# Altium PCB main_old.PcbDoc (part 6 of 15)
Units mil, origin at the board's own origin, x right, y up, seen from the top; angles counter-clockwise.
Board outline 8394.55 x 5164.44 mil, 7 copper layers (Top Layer 1, Layer 2, Layer 3, Unused, Layer 4_pow, Layer 5_gnd, Bottom 6+gnd), stack 46.112 mil thick; 363 components, 409 nets, 1750 pads, 991 vias.
Unrouted connection lines stored in the file: 1.
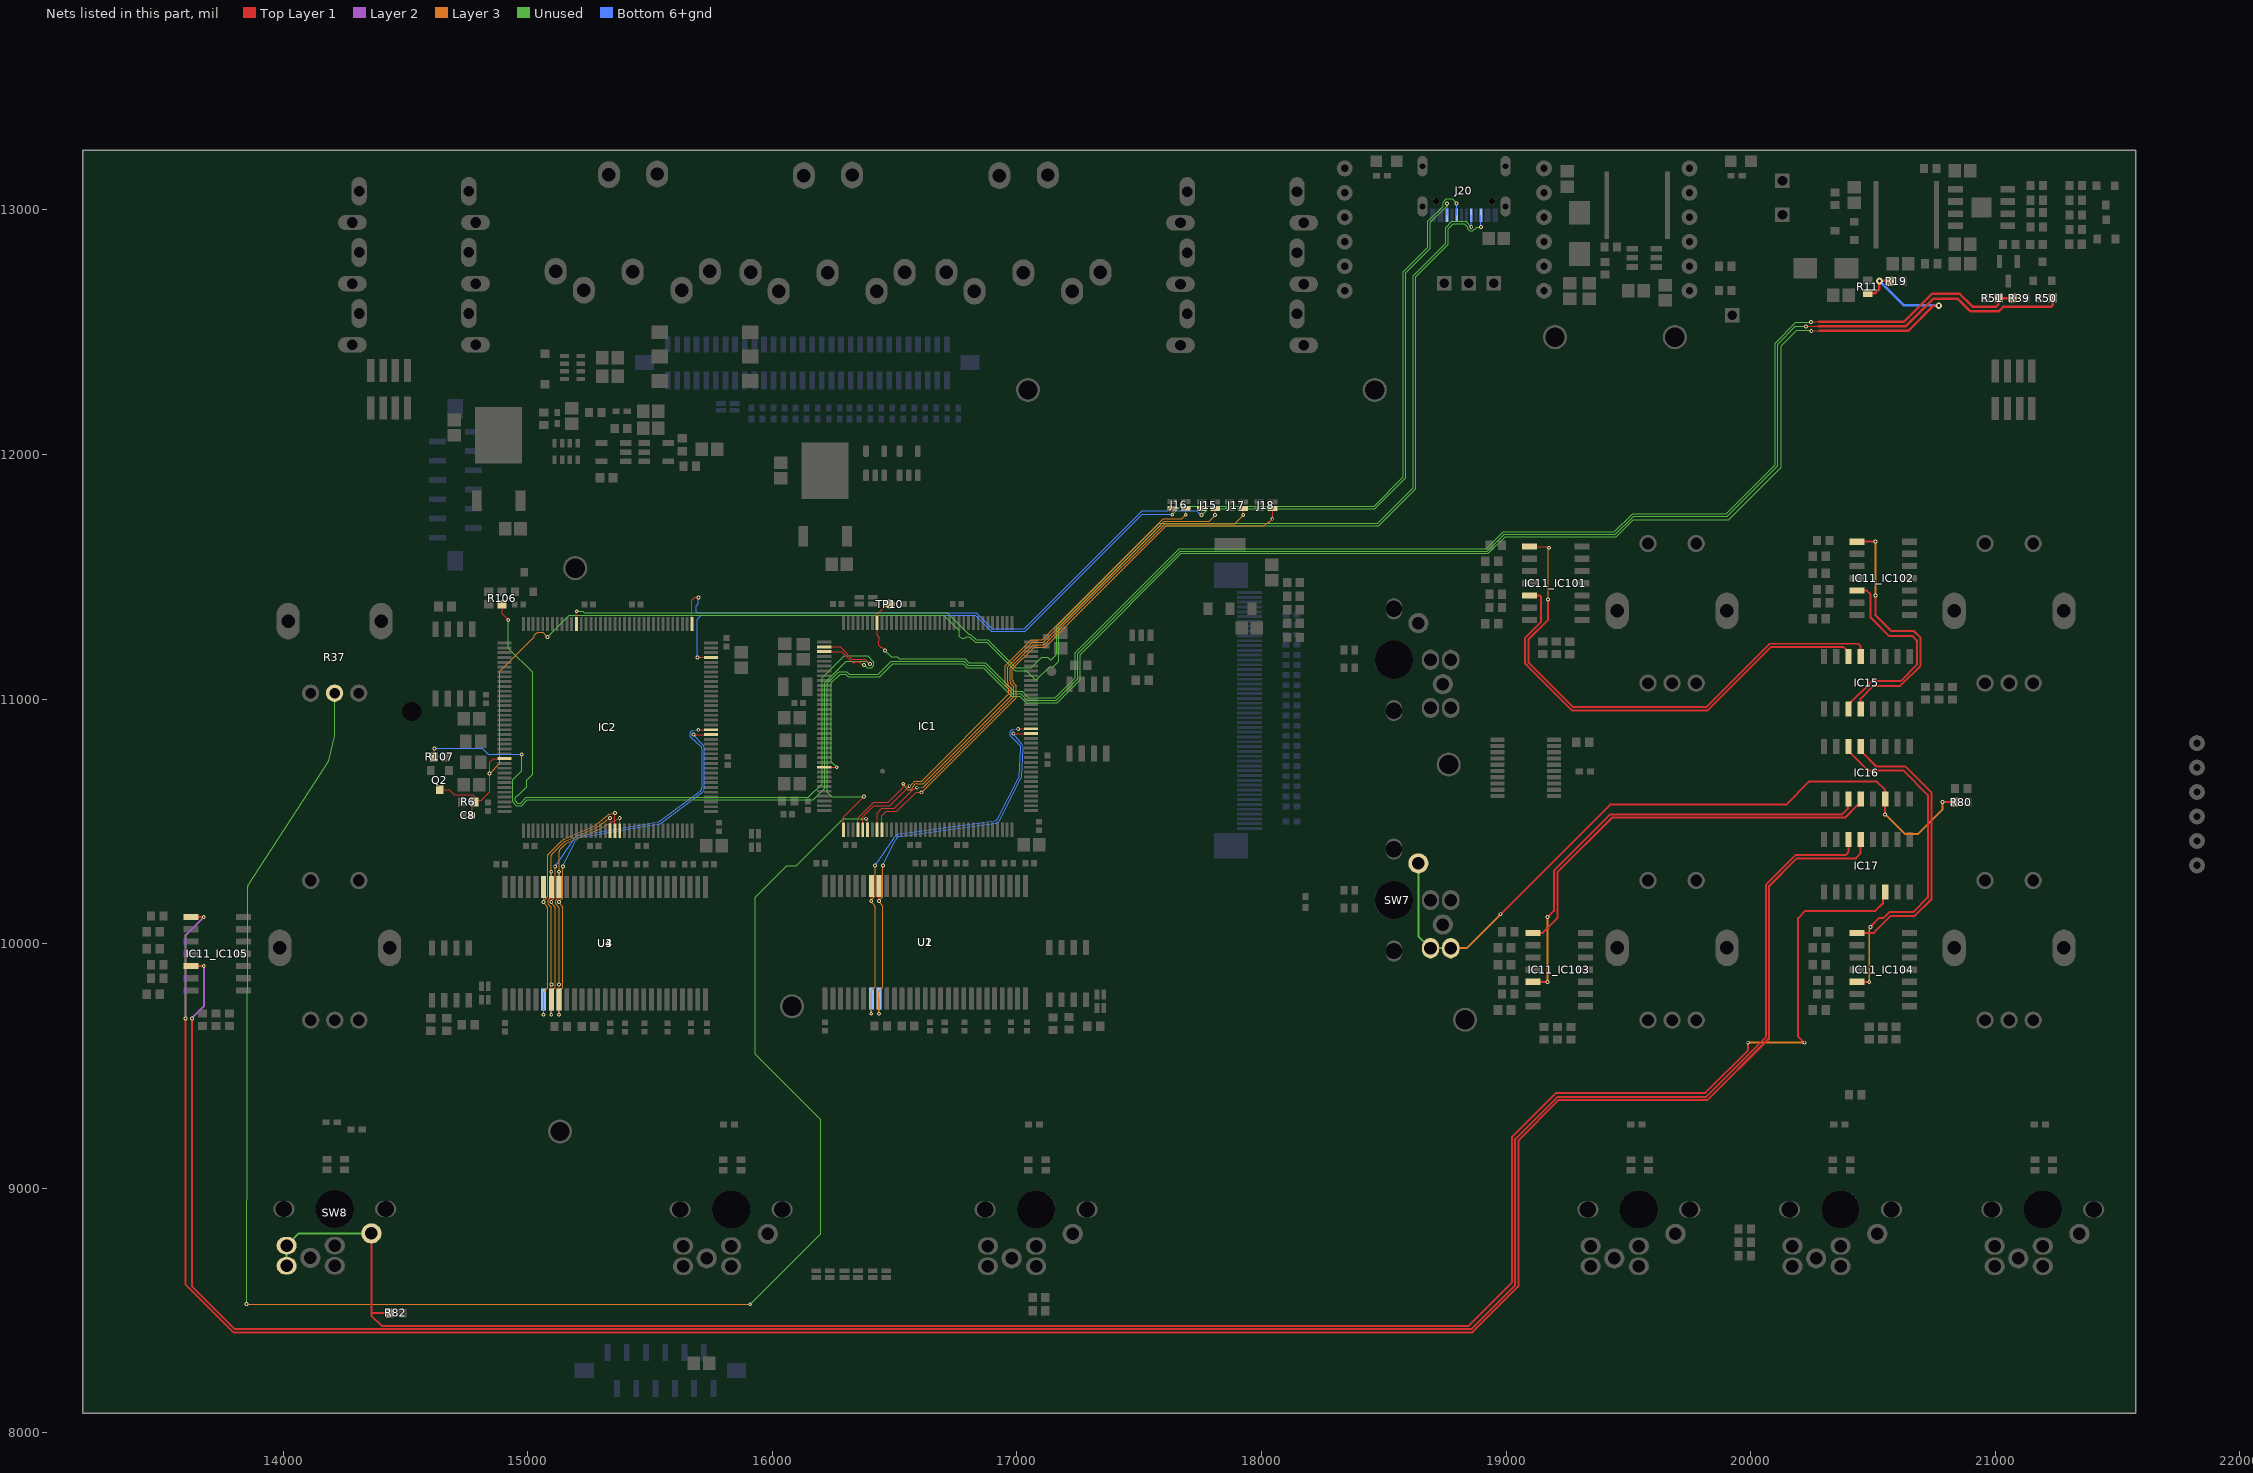
[diagram p9: the nets of this part, all layers, seen from the top]

## Via types
v1: diameter 15.75, hole 7.87, Top Layer 1 to Bottom 6+gnd, tented both sides, 923 vias
v2: diameter 27.56, hole 11.81, Top Layer 1 to Bottom 6+gnd, 45 vias
v3: diameter 23.62/23.62/23.62/23.62/23.62/23.62/23.62 (per signal layer), hole 12, Top Layer 1 to Bottom 6+gnd, tented top, 10 vias
v4: diameter 15.75, hole 7.87, Top Layer 1 to Bottom 6+gnd, 10 vias
v5: diameter 23.62/23.62/23.62/23.62/23.62/23.62/23.62 (per signal layer), hole 12, Top Layer 1 to Bottom 6+gnd, tented bottom, 3 vias

## Nets (pads, with @x,y where several pads share a name; then routed paths per layer and width w, separated by ;. In a path a pad name is that pad's centre, name@x,y a point inside that pad or via, vN(x,y) a via of type N, cw(c..) or ccw(c..) an arc to the next point about the centre after c; other vN are vias at no path point) (continued)
AA9: IC2.55 U3.34 U4.34 | length 1334.1
  Top Layer 1 w5: U3.34@15096.23,9771.46 v1@15096.23,9833.49 ; IC2.55@15336.54,10461.87 v1@15336.54,10514.16
  Layer 3 w5: v1(15096.47,9833.49) 15096.47,10145.64 ; 15096.47,10195.56 15096.47,10293.63 v1(15095.98,10294.12) 15095.98,10361.3 ; v1(15336.31,10514.39) 15285.31,10477.77 ; 15095.02,10149.12 cw(c15091.47,10145.59) 15096.47,10145.68 ; 15095.02,10149.12 cw(c15091.47,10145.59) 15096.47,10145.68 ; 15095.02,10149.12 cw(c15091.47,10145.59) 15096.47,10145.68 ; 15095.02,10149.12 cw(c15091.47,10145.59) 15096.47,10145.68 ; 15095.02,10149.12 cw(c15091.47,10145.59) 15096.47,10145.68 ; 15095.02,10149.12 cw(c15091.47,10145.59) 15096.47,10145.68 ; 15095.02,10149.12 cw(c15091.47,10145.59) 15096.47,10145.68 ; 15095.02,10149.12 cw(c15091.47,10145.59) 15096.47,10145.68 ; 15095.02,10149.12 cw(c15091.47,10145.59) 15096.47,10145.68 ; 15095.02,10149.12 cw(c15091.47,10145.59) 15096.47,10145.68 ; 15095.02,10149.12 cw(c15091.47,10145.59) 15096.47,10145.68 ; 15095.02,10149.12 cw(c15091.47,10145.59) 15096.47,10145.68 ; 15095.02,10149.12 cw(c15091.47,10145.59) 15096.47,10145.68 ; 15095.02,10149.12 cw(c15091.47,10145.59) 15096.47,10145.68 ; 15095.02,10149.12 cw(c15091.47,10145.59) 15096.47,10145.68 ; 15095.02,10149.12 cw(c15091.47,10145.59) 15096.47,10145.68 ; 15095.02,10149.12 15085.09,10159.1 cw(c15095.98,10169.94) 15084.46,10180.12 15095.22,10192.29 ; 15095.22,10192.29 ccw(c15091.47,10195.6) 15096.47,10195.51 ; 15095.22,10192.29 ccw(c15091.47,10195.6) 15096.47,10195.51 ; 15095.22,10192.29 ccw(c15091.47,10195.6) 15096.47,10195.51 ; 15095.22,10192.29 ccw(c15091.47,10195.6) 15096.47,10195.51 ; 15095.22,10192.29 ccw(c15091.47,10195.6) 15096.47,10195.51 ; 15095.22,10192.29 ccw(c15091.47,10195.6) 15096.47,10195.51 ; 15095.22,10192.29 ccw(c15091.47,10195.6) 15096.47,10195.51 ; 15095.22,10192.29 ccw(c15091.47,10195.6) 15096.47,10195.51 ; 15095.22,10192.29 ccw(c15091.47,10195.6) 15096.47,10195.51 ; 15095.22,10192.29 ccw(c15091.47,10195.6) 15096.47,10195.51 ; 15095.22,10192.29 ccw(c15091.47,10195.6) 15096.47,10195.51 ; 15095.22,10192.29 ccw(c15091.47,10195.6) 15096.47,10195.51 ; 15095.22,10192.29 ccw(c15091.47,10195.6) 15096.47,10195.51 ; 15095.22,10192.29 ccw(c15091.47,10195.6) 15096.47,10195.51 ; 15095.22,10192.29 ccw(c15091.47,10195.6) 15096.47,10195.51 ; 15095.22,10192.29 ccw(c15091.47,10195.6) 15096.47,10195.51 ; 15095.98,10361.3 cw(c15100.98,10361.3) 15097.43,10364.82 ; 15095.98,10361.3 cw(c15100.98,10361.3) 15097.43,10364.82 ; 15095.98,10361.3 cw(c15100.98,10361.3) 15097.43,10364.82 ; 15095.98,10361.3 cw(c15100.98,10361.3) 15097.43,10364.82 ; 15095.98,10361.3 cw(c15100.98,10361.3) 15097.43,10364.82 ; 15095.98,10361.3 cw(c15100.98,10361.3) 15097.43,10364.82 ; 15095.98,10361.3 cw(c15100.98,10361.3) 15097.43,10364.82 ; 15095.98,10361.3 cw(c15100.98,10361.3) 15097.43,10364.82 ; 15095.98,10361.3 cw(c15100.98,10361.3) 15097.43,10364.82 ; 15095.98,10361.3 cw(c15100.98,10361.3) 15097.43,10364.82 ; 15095.98,10361.3 cw(c15100.98,10361.3) 15097.43,10364.82 ; 15095.98,10361.3 cw(c15100.98,10361.3) 15097.43,10364.82 ; 15095.98,10361.3 cw(c15100.98,10361.3) 15097.43,10364.82 ; 15095.98,10361.3 cw(c15100.98,10361.3) 15097.43,10364.82 ; 15095.98,10361.3 cw(c15100.98,10361.3) 15097.43,10364.82 ; 15095.98,10361.3 cw(c15100.98,10361.3) 15097.43,10364.82 ; 15097.43,10364.82 15146.35,10413.74 cw(c15163.98,10396.01) 15153.64,10418.77 15203.81,10441.59 ; 15203.81,10441.59 cw(c15218.49,10409.41) 15204.62,10441.95 ; 15203.81,10441.59 cw(c15218.49,10409.41) 15204.62,10441.95 ; 15203.81,10441.59 cw(c15218.49,10409.41) 15204.62,10441.95 ; 15203.81,10441.59 cw(c15218.49,10409.41) 15204.62,10441.95 ; 15203.81,10441.59 cw(c15218.49,10409.41) 15204.62,10441.95 ; 15203.81,10441.59 cw(c15218.49,10409.41) 15204.62,10441.95 ; 15203.81,10441.59 cw(c15218.49,10409.41) 15204.62,10441.95 ; 15203.81,10441.59 cw(c15218.49,10409.41) 15204.62,10441.95 ; 15203.81,10441.59 cw(c15218.49,10409.41) 15204.62,10441.95 ; 15203.81,10441.59 cw(c15218.49,10409.41) 15204.62,10441.95 ; 15203.81,10441.59 cw(c15218.49,10409.41) 15204.62,10441.95 ; 15203.81,10441.59 cw(c15218.49,10409.41) 15204.62,10441.95 ; 15203.81,10441.59 cw(c15218.49,10409.41) 15204.62,10441.95 ; 15203.81,10441.59 cw(c15218.49,10409.41) 15204.62,10441.95 ; 15203.81,10441.59 cw(c15218.49,10409.41) 15204.62,10441.95 ; 15203.81,10441.59 cw(c15218.49,10409.41) 15204.62,10441.95 ; 15204.62,10441.95 15276.75,10472.94 ; 15276.75,10472.94 ccw(c15258.85,10514.63) 15285.31,10477.77 ; 15276.75,10472.94 ccw(c15258.85,10514.63) 15285.31,10477.77 ; 15276.75,10472.94 ccw(c15258.85,10514.63) 15285.31,10477.77 ; 15276.75,10472.94 ccw(c15258.85,10514.63) 15285.31,10477.77 ; 15276.75,10472.94 ccw(c15258.85,10514.63) 15285.31,10477.77 ; 15276.75,10472.94 ccw(c15258.85,10514.63) 15285.31,10477.77 ; 15276.75,10472.94 ccw(c15258.85,10514.63) 15285.31,10477.77 ; 15276.75,10472.94 ccw(c15258.85,10514.63) 15285.31,10477.77 ; 15276.75,10472.94 ccw(c15258.85,10514.63) 15285.31,10477.77 ; 15276.75,10472.94 ccw(c15258.85,10514.63) 15285.31,10477.77 ; 15276.75,10472.94 ccw(c15258.85,10514.63) 15285.31,10477.77 ; 15276.75,10472.94 ccw(c15258.85,10514.63) 15285.31,10477.77 ; 15276.75,10472.94 ccw(c15258.85,10514.63) 15285.31,10477.77 ; 15276.75,10472.94 ccw(c15258.85,10514.63) 15285.31,10477.77 ; 15276.75,10472.94 ccw(c15258.85,10514.63) 15285.31,10477.77 ; 15276.75,10472.94 ccw(c15258.85,10514.63) 15285.31,10477.77
  Bottom 6+gnd w5: U4.34@15096.23,10232.03 v1@15096.23,10293.87
AA10: IC2.56 U3.22 U4.22 | length 1723.1
  Top Layer 1 w5: v1@15064.73,10170.19 U3.22@15064.73,10232.03 ; IC2.56@15356.39,10461.71 v1@15356.39,10534.31
  Layer 3 w5: v1(15064.49,9709.31) 15064.49,9803 15080.61,9819.12 15080.61,10145.78 ; v1(15064.49,10169.94) ccw(c15068.64,10172.73) 15064.57,10169.82 15079.68,10148.64 ; v1@15064.49,10175.64 15064.49,10175.51 cw(c15068.64,10172.73) 15065.07,10176.22 15079.15,10190.35 ; 15080.61,10193.83 15080.61,10360.07 ; v1(15356.31,10534.39) 15333.09,10529.43 ccw(c15336.31,10514.39) 15326.04,10525.84 15303.65,10505.74 ; 15079.15,10190.35 ccw(c15075.61,10193.88) 15080.61,10193.79 ; 15079.15,10190.35 ccw(c15075.61,10193.88) 15080.61,10193.79 ; 15079.15,10190.35 ccw(c15075.61,10193.88) 15080.61,10193.79 ; 15079.15,10190.35 ccw(c15075.61,10193.88) 15080.61,10193.79 ; 15079.15,10190.35 ccw(c15075.61,10193.88) 15080.61,10193.79 ; 15079.15,10190.35 ccw(c15075.61,10193.88) 15080.61,10193.79 ; 15079.15,10190.35 ccw(c15075.61,10193.88) 15080.61,10193.79 ; 15079.15,10190.35 ccw(c15075.61,10193.88) 15080.61,10193.79 ; 15079.15,10190.35 ccw(c15075.61,10193.88) 15080.61,10193.79 ; 15079.15,10190.35 ccw(c15075.61,10193.88) 15080.61,10193.79 ; 15079.15,10190.35 ccw(c15075.61,10193.88) 15080.61,10193.79 ; 15079.15,10190.35 ccw(c15075.61,10193.88) 15080.61,10193.79 ; 15079.15,10190.35 ccw(c15075.61,10193.88) 15080.61,10193.79 ; 15079.15,10190.35 ccw(c15075.61,10193.88) 15080.61,10193.79 ; 15079.15,10190.35 ccw(c15075.61,10193.88) 15080.61,10193.79 ; 15079.15,10190.35 ccw(c15075.61,10193.88) 15080.61,10193.79 ; 15079.68,10148.64 cw(c15075.61,10145.74) 15080.61,10145.83 ; 15079.68,10148.64 cw(c15075.61,10145.74) 15080.61,10145.83 ; 15079.68,10148.64 cw(c15075.61,10145.74) 15080.61,10145.83 ; 15079.68,10148.64 cw(c15075.61,10145.74) 15080.61,10145.83 ; 15079.68,10148.64 cw(c15075.61,10145.74) 15080.61,10145.83 ; 15079.68,10148.64 cw(c15075.61,10145.74) 15080.61,10145.83 ; 15079.68,10148.64 cw(c15075.61,10145.74) 15080.61,10145.83 ; 15079.68,10148.64 cw(c15075.61,10145.74) 15080.61,10145.83 ; 15079.68,10148.64 cw(c15075.61,10145.74) 15080.61,10145.83 ; 15079.68,10148.64 cw(c15075.61,10145.74) 15080.61,10145.83 ; 15079.68,10148.64 cw(c15075.61,10145.74) 15080.61,10145.83 ; 15079.68,10148.64 cw(c15075.61,10145.74) 15080.61,10145.83 ; 15079.68,10148.64 cw(c15075.61,10145.74) 15080.61,10145.83 ; 15079.68,10148.64 cw(c15075.61,10145.74) 15080.61,10145.83 ; 15079.68,10148.64 cw(c15075.61,10145.74) 15080.61,10145.83 ; 15079.68,10148.64 cw(c15075.61,10145.74) 15080.61,10145.83 ; 15080.61,10360.07 cw(c15085.61,10360.07) 15082.05,10363.58 ; 15080.61,10360.07 cw(c15085.61,10360.07) 15082.05,10363.58 ; 15080.61,10360.07 cw(c15085.61,10360.07) 15082.05,10363.58 ; 15080.61,10360.07 cw(c15085.61,10360.07) 15082.05,10363.58 ; 15080.61,10360.07 cw(c15085.61,10360.07) 15082.05,10363.58 ; 15080.61,10360.07 cw(c15085.61,10360.07) 15082.05,10363.58 ; 15080.61,10360.07 cw(c15085.61,10360.07) 15082.05,10363.58 ; 15080.61,10360.07 cw(c15085.61,10360.07) 15082.05,10363.58 ; 15080.61,10360.07 cw(c15085.61,10360.07) 15082.05,10363.58 ; 15080.61,10360.07 cw(c15085.61,10360.07) 15082.05,10363.58 ; 15080.61,10360.07 cw(c15085.61,10360.07) 15082.05,10363.58 ; 15080.61,10360.07 cw(c15085.61,10360.07) 15082.05,10363.58 ; 15080.61,10360.07 cw(c15085.61,10360.07) 15082.05,10363.58 ; 15080.61,10360.07 cw(c15085.61,10360.07) 15082.05,10363.58 ; 15080.61,10360.07 cw(c15085.61,10360.07) 15082.05,10363.58 ; 15080.61,10360.07 cw(c15085.61,10360.07) 15082.05,10363.58 ; 15082.05,10363.58 15139.3,10420.83 ; 15139.3,10420.83 cw(c15163.98,10396.01) 15149.53,10427.89 ; 15139.3,10420.83 cw(c15163.98,10396.01) 15149.53,10427.89 ; 15139.3,10420.83 cw(c15163.98,10396.01) 15149.53,10427.89 ; 15139.3,10420.83 cw(c15163.98,10396.01) 15149.53,10427.89 ; 15139.3,10420.83 cw(c15163.98,10396.01) 15149.53,10427.89 ; 15139.3,10420.83 cw(c15163.98,10396.01) 15149.53,10427.89 ; 15139.3,10420.83 cw(c15163.98,10396.01) 15149.53,10427.89 ; 15139.3,10420.83 cw(c15163.98,10396.01) 15149.53,10427.89 ; 15139.3,10420.83 cw(c15163.98,10396.01) 15149.53,10427.89 ; 15139.3,10420.83 cw(c15163.98,10396.01) 15149.53,10427.89 ; 15139.3,10420.83 cw(c15163.98,10396.01) 15149.53,10427.89 ; 15139.3,10420.83 cw(c15163.98,10396.01) 15149.53,10427.89 ; 15139.3,10420.83 cw(c15163.98,10396.01) 15149.53,10427.89 ; 15139.3,10420.83 cw(c15163.98,10396.01) 15149.53,10427.89 ; 15139.3,10420.83 cw(c15163.98,10396.01) 15149.53,10427.89 ; 15139.3,10420.83 cw(c15163.98,10396.01) 15149.53,10427.89 ; 15149.53,10427.89 15199.7,10450.71 ; 15199.7,10450.71 cw(c15218.49,10409.41) 15200.64,10451.13 ; 15199.7,10450.71 cw(c15218.49,10409.41) 15200.64,10451.13 ; 15199.7,10450.71 cw(c15218.49,10409.41) 15200.64,10451.13 ; 15199.7,10450.71 cw(c15218.49,10409.41) 15200.64,10451.13 ; 15199.7,10450.71 cw(c15218.49,10409.41) 15200.64,10451.13 ; 15199.7,10450.71 cw(c15218.49,10409.41) 15200.65,10451.13 ; 15199.7,10450.71 cw(c15218.49,10409.41) 15200.64,10451.13 ; 15199.7,10450.71 cw(c15218.49,10409.41) 15200.65,10451.13 ; 15199.7,10450.71 cw(c15218.49,10409.41) 15200.64,10451.13 ; 15199.7,10450.71 cw(c15218.49,10409.41) 15200.64,10451.13 ; 15199.7,10450.71 cw(c15218.49,10409.41) 15200.64,10451.13 ; 15199.7,10450.71 cw(c15218.49,10409.41) 15200.64,10451.13 ; 15199.7,10450.71 cw(c15218.49,10409.41) 15200.64,10451.13 ; 15199.7,10450.71 cw(c15218.49,10409.41) 15200.64,10451.13 ; 15199.7,10450.71 cw(c15218.49,10409.41) 15200.64,10451.13 ; 15199.7,10450.71 cw(c15218.49,10409.41) 15200.64,10451.13 ; 15200.65,10451.13 15272.81,10482.13 ; 15272.81,10482.13 ccw(c15258.85,10514.63) 15281.34,10487.33 ; 15272.81,10482.13 ccw(c15258.85,10514.63) 15281.34,10487.33 ; 15272.81,10482.13 ccw(c15258.85,10514.63) 15281.34,10487.33 ; 15272.81,10482.13 ccw(c15258.85,10514.63) 15281.34,10487.33 ; 15272.81,10482.13 ccw(c15258.85,10514.63) 15281.34,10487.33 ; 15272.81,10482.13 ccw(c15258.85,10514.63) 15281.34,10487.33 ; 15272.81,10482.13 ccw(c15258.85,10514.63) 15281.34,10487.33 ; 15272.81,10482.13 ccw(c15258.85,10514.63) 15281.34,10487.33 ; 15272.81,10482.13 ccw(c15258.85,10514.63) 15281.34,10487.33 ; 15272.81,10482.13 ccw(c15258.85,10514.63) 15281.34,10487.33 ; 15272.81,10482.13 ccw(c15258.85,10514.63) 15281.34,10487.33 ; 15272.81,10482.13 ccw(c15258.85,10514.63) 15281.34,10487.33 ; 15272.81,10482.13 ccw(c15258.85,10514.63) 15281.34,10487.33 ; 15272.81,10482.13 ccw(c15258.85,10514.63) 15281.34,10487.33 ; 15272.81,10482.13 ccw(c15258.85,10514.63) 15281.34,10487.33 ; 15272.81,10482.13 ccw(c15258.85,10514.63) 15281.34,10487.33 ; 15281.34,10487.33 15302.84,10505.05 ; 15302.84,10505.05 ccw(c15286.7,10524.63) 15303.65,10505.74 ; 15302.84,10505.05 ccw(c15286.7,10524.63) 15303.65,10505.74 ; 15302.84,10505.05 ccw(c15286.7,10524.63) 15303.65,10505.74 ; 15302.84,10505.05 ccw(c15286.7,10524.63) 15303.65,10505.74 ; 15302.84,10505.05 ccw(c15286.7,10524.63) 15303.65,10505.74 ; 15302.84,10505.05 ccw(c15286.7,10524.63) 15303.65,10505.74 ; 15302.84,10505.05 ccw(c15286.7,10524.63) 15303.65,10505.74 ; 15302.84,10505.05 ccw(c15286.7,10524.63) 15303.65,10505.74 ; 15302.84,10505.05 ccw(c15286.7,10524.63) 15303.65,10505.74 ; 15302.84,10505.05 ccw(c15286.7,10524.63) 15303.65,10505.74 ; 15302.84,10505.05 ccw(c15286.7,10524.63) 15303.65,10505.74 ; 15302.84,10505.05 ccw(c15286.7,10524.63) 15303.65,10505.74 ; 15302.84,10505.05 ccw(c15286.7,10524.63) 15303.65,10505.74 ; 15302.84,10505.05 ccw(c15286.7,10524.63) 15303.65,10505.74 ; 15302.84,10505.05 ccw(c15286.7,10524.63) 15303.65,10505.74 ; 15302.84,10505.05 ccw(c15286.7,10524.63) 15303.65,10505.74
  Bottom 6+gnd w5: v1@15064.73,9709.56 U4.22@15064.73,9771.4
AA11: IC2.57 U3.35 U4.35 | length 1197.8
  Top Layer 1 w5: U3.35@15127.72,9771.4 v1@15127.72,9833.49 ; IC2.57@15375.91,10461.87 v1@15375.91,10514.16
  Layer 3 w5: v1(15127.97,9833.49) 15127.97,10145.64 ; 15127.97,10195.56 15127.97,10293.63 v1(15127.48,10294.12) 15127.48,10378.65 ; v1(15375.68,10514.39) 15284.99,10465.82 cw(c15258.85,10514.63) 15280.72,10463.76 15208.57,10432.77 ; 15126.51,10149.12 cw(c15122.97,10145.59) 15127.97,10145.68 ; 15126.51,10149.12 cw(c15122.97,10145.59) 15127.97,10145.68 ; 15126.51,10149.12 cw(c15122.97,10145.59) 15127.97,10145.68 ; 15126.51,10149.12 cw(c15122.97,10145.59) 15127.97,10145.68 ; 15126.51,10149.12 cw(c15122.97,10145.59) 15127.97,10145.68 ; 15126.51,10149.12 cw(c15122.97,10145.59) 15127.97,10145.68 ; 15126.51,10149.12 cw(c15122.97,10145.59) 15127.97,10145.68 ; 15126.51,10149.12 cw(c15122.97,10145.59) 15127.97,10145.68 ; 15126.51,10149.12 cw(c15122.97,10145.59) 15127.97,10145.68 ; 15126.51,10149.12 cw(c15122.97,10145.59) 15127.97,10145.68 ; 15126.51,10149.12 cw(c15122.97,10145.59) 15127.97,10145.68 ; 15126.51,10149.12 cw(c15122.97,10145.59) 15127.97,10145.68 ; 15126.51,10149.12 cw(c15122.97,10145.59) 15127.97,10145.68 ; 15126.51,10149.12 cw(c15122.97,10145.59) 15127.97,10145.68 ; 15126.51,10149.12 cw(c15122.97,10145.59) 15127.97,10145.68 ; 15126.51,10149.12 cw(c15122.97,10145.59) 15127.97,10145.68 ; 15126.51,10149.12 15116.58,10159.1 cw(c15127.48,10169.94) 15115.96,10180.12 15126.71,10192.29 ; 15126.71,10192.29 ccw(c15122.97,10195.6) 15127.97,10195.51 ; 15126.71,10192.29 ccw(c15122.97,10195.6) 15127.97,10195.51 ; 15126.71,10192.29 ccw(c15122.97,10195.6) 15127.97,10195.51 ; 15126.71,10192.29 ccw(c15122.97,10195.6) 15127.97,10195.51 ; 15126.71,10192.29 ccw(c15122.97,10195.6) 15127.97,10195.51 ; 15126.71,10192.29 ccw(c15122.97,10195.6) 15127.97,10195.51 ; 15126.71,10192.29 ccw(c15122.97,10195.6) 15127.97,10195.51 ; 15126.71,10192.29 ccw(c15122.97,10195.6) 15127.97,10195.51 ; 15126.71,10192.29 ccw(c15122.97,10195.6) 15127.97,10195.51 ; 15126.71,10192.29 ccw(c15122.97,10195.6) 15127.97,10195.51 ; 15126.71,10192.29 ccw(c15122.97,10195.6) 15127.97,10195.51 ; 15126.71,10192.29 ccw(c15122.97,10195.6) 15127.97,10195.51 ; 15126.71,10192.29 ccw(c15122.97,10195.6) 15127.97,10195.51 ; 15126.71,10192.29 ccw(c15122.97,10195.6) 15127.97,10195.51 ; 15126.71,10192.29 ccw(c15122.97,10195.6) 15127.97,10195.51 ; 15126.71,10192.29 ccw(c15122.97,10195.6) 15127.97,10195.51 ; 15127.48,10378.65 cw(c15132.48,10378.65) 15128.92,10382.17 ; 15127.48,10378.65 cw(c15132.48,10378.65) 15128.92,10382.17 ; 15127.48,10378.65 cw(c15132.48,10378.65) 15128.92,10382.17 ; 15127.48,10378.65 cw(c15132.48,10378.65) 15128.92,10382.17 ; 15127.48,10378.65 cw(c15132.48,10378.65) 15128.92,10382.17 ; 15127.48,10378.65 cw(c15132.48,10378.65) 15128.92,10382.17 ; 15127.48,10378.65 cw(c15132.48,10378.65) 15128.92,10382.17 ; 15127.48,10378.65 cw(c15132.48,10378.65) 15128.92,10382.17 ; 15127.48,10378.65 cw(c15132.48,10378.65) 15128.92,10382.17 ; 15127.48,10378.65 cw(c15132.48,10378.65) 15128.92,10382.17 ; 15127.48,10378.65 cw(c15132.48,10378.65) 15128.92,10382.17 ; 15127.48,10378.65 cw(c15132.48,10378.65) 15128.92,10382.17 ; 15127.48,10378.65 cw(c15132.48,10378.65) 15128.92,10382.17 ; 15127.48,10378.65 cw(c15132.48,10378.65) 15128.92,10382.17 ; 15127.48,10378.65 cw(c15132.48,10378.65) 15128.92,10382.17 ; 15127.48,10378.65 cw(c15132.48,10378.65) 15128.92,10382.17 ; 15128.92,10382.17 15153.41,10406.65 cw(c15163.98,10396.01) 15157.76,10409.66 15207.93,10432.48 ; 15207.93,10432.48 cw(c15218.49,10409.41) 15208.57,10432.77 ; 15207.93,10432.48 cw(c15218.49,10409.41) 15208.57,10432.77 ; 15207.93,10432.48 cw(c15218.49,10409.41) 15208.57,10432.77 ; 15207.93,10432.48 cw(c15218.49,10409.41) 15208.57,10432.77 ; 15207.93,10432.48 cw(c15218.49,10409.41) 15208.57,10432.77 ; 15207.93,10432.48 cw(c15218.49,10409.41) 15208.57,10432.77 ; 15207.93,10432.48 cw(c15218.49,10409.41) 15208.57,10432.77 ; 15207.93,10432.48 cw(c15218.49,10409.41) 15208.57,10432.77 ; 15207.93,10432.48 cw(c15218.49,10409.41) 15208.57,10432.77 ; 15207.93,10432.48 cw(c15218.49,10409.41) 15208.57,10432.77 ; 15207.93,10432.48 cw(c15218.49,10409.41) 15208.57,10432.77 ; 15207.93,10432.48 cw(c15218.49,10409.41) 15208.57,10432.77 ; 15207.93,10432.48 cw(c15218.49,10409.41) 15208.57,10432.77 ; 15207.93,10432.48 cw(c15218.49,10409.41) 15208.57,10432.77 ; 15207.93,10432.48 cw(c15218.49,10409.41) 15208.57,10432.77 ; 15207.93,10432.48 cw(c15218.49,10409.41) 15208.57,10432.77
  Bottom 6+gnd w5: U4.35@15127.72,10232.03 v1@15127.72,10293.87
ADC3: IC1.40 J15.3 | length 2171.1
  Top Layer 1 w5: IC1.40@16349.57,10466.06 16349.57,10513.38 16413.58,10577.4 16473.58,10577.4 16535,10638.82 v1(16535,10653.82) ; v1@17810.12,11752.72 J15.3@17810.12,11778.82
  Layer 3 w5: v1(16535,10653.82) 16546.82,10635.49 ccw(c16559.74,10643.82) 16573.97,10637.99 16576.26,10643.59 cw(c16590.49,10637.76) 16590.05,10653.13 16614.81,10653.84 ccw(c16614.66,10658.84) 16618.18,10655.28 16977.24,11014.34 16977.24,11045.72 16965.34,11057.62 16965.34,11066.26 16961.71,11069.89 16961.71,11131.86 17062.69,11232.83 17107.93,11232.83 17251.82,11376.72 17251.82,11377.1 17602.59,11727.87 17785.51,11727.87 v1(17810.24,11752.6)
ADC4: IC1.41 J16.3 | length 2000.2
  Top Layer 1 w5: IC1.41@16369.25,10466.06 16369.27,10503.18 16367.67,10504.78 16367.67,10517.35 16414.56,10564.23 16480.16,10564.23 v1(16559.74,10643.82) ; v1@17690,11753.94 J16.3@17690,11780.04
  Layer 3 w5: v1(16559.74,10643.82) 16573.21,10656.34 cw(c16590.49,10637.76) 16589.04,10663.1 16608.61,10664.22 ccw(c16608.32,10669.21) 16611.84,10665.66 16967.24,11021.06 16967.24,11041.58 16955.34,11053.48 16955.34,11062.12 16951.71,11065.75 16951.71,11136 17058.54,11242.83 17103.78,11242.83 17240,11379.05 17240,11379.43 17598.45,11737.87 17674.17,11737.87 v1(17690.12,11753.82)
ADC5: IC1.44 J17.3 | length 2185.5
  Top Layer 1 w5: IC1.44@16428.42,10466.17 16428.42,10533.33 16447.78,10552.7 16498.88,10552.7 16574.58,10628.4 16578.22,10628.4 16587.58,10637.76 v1(16590.49,10637.76) ; v1@17925.12,11752.72 J17.3@17925.12,11778.82
  Layer 3 w5: v1(16590.49,10637.76) 16614.01,10638.82 ccw(c16613.79,10643.82) 16617.32,10640.28 16987.24,11010.2 16987.24,11049.86 16975.34,11061.76 16975.34,11070.4 16971.71,11074.03 16971.71,11127.72 17066.83,11222.83 17112.07,11222.83 17261.82,11372.58 17261.82,11372.96 17606.73,11717.87 17890.51,11717.87 v1(17925.24,11752.6)
ADC6: IC1.45 J18.3 | length 2289.6
  Top Layer 1 w5: IC1.45@16447.99,10466.06 16447.99,10523.99 16464.83,10540.83 16509.29,10540.83 16587.28,10618.82 v1(16610,10618.82) ; v1(18044.13,11737.22) 18045.12,11738.21 J18.3@18045.12,11778.82
  Layer 3 w5: v1(16610,10618.82) 16997.24,11006.06 16997.24,11054 16985.34,11065.9 16985.34,11074.55 16981.71,11078.18 16981.71,11123.57 17070.97,11212.83 17116.21,11212.83 17271.82,11368.44 17271.82,11368.82 17610.87,11707.87 18011.84,11707.87 18030.02,11726.06 18032.96,11726.06 v1(18044.13,11737.22)
ADC_ON: IC1.137 R39.1 R51.2 TP10.1 | length 6013.1
  Top Layer 1 w5: v1(16460,11198.82) 16446.96,11211.86 16443.5,11211.86 16434.49,11220.87 16434.49,11237.47 16437.23,11240.21 16437.23,11252.94 16428.31,11261.87 IC1.137@16428.31,11311.57 16428.31,11347.13 16460.78,11379.6 16461.48,11379.6 16470.7,11388.82 TP10.1@16480,11388.82 ; v1(20247.25,12542.24) 20279.38,12542.24 20279.84,12542.7
  Top Layer 1 w10: 20279.84,12542.7 20627.1,12542.7 20741.97,12657.57 20854.48,12657.57 20907.06,12605 21004.02,12605 21013.39,12614.37 R51.2@21013.39,12639.37 R39.1@21072.2,12639.37
  Unused w5: v1(16460,11198.82) 16485.07,11173.74 16510.06,11173.74 16519.53,11164.27 16788.4,11164.27 16803.85,11148.82 16869.75,11148.82 16986.83,11031.74 17021.22,11031.74 17047.13,11005.83 17156,11005.83 17238,11087.82 17238,11189.4 17663.99,11615.39 18919,11615.39 18987.43,11683.82 19442.43,11683.82 19517.05,11758.44 19900.87,11758.44 20100,11957.57 20100,12455.88 20184.12,12540 20238.94,12540 20239.12,12540.18 20245.19,12540.18 v1(20247.25,12542.24)
ADC_VBAT: IC1.37 R50.2 | length 6977.6
  Top Layer 1 w5: IC1.37@16290.51,10472.3 16290.51,10517.58 v1(16374.13,10601.21) ; v1(20227,12523.86) 20279.11,12523.86 20279.26,12524.01
  Top Layer 1 w10: 20279.26,12524.01 20633.67,12524.01 20747.24,12637.57 20846.2,12637.57 20898.77,12585 21014.02,12585 21033.35,12604.34 21228.71,12604.34 21234.57,12610.19 R50.2@21234.57,12639.37
  Unused w5: v1(16374.13,10601.21) 16243.48,10601.21 16241.32,10603.37 16225,10619.68 16225,11063.82 16272.29,11111.1 16304.02,11111.1 16313.29,11101.83 16433.01,11101.83 16485.46,11154.27 16784.26,11154.27 16799.71,11138.82 16865.6,11138.82 16982.68,11021.74 17015.23,11021.74 17041.14,10995.83 17160.15,10995.83 17248,11083.68 17248,11185.26 17668.13,11605.39 18923.14,11605.39 18991.57,11673.82 19446.57,11673.82 19521.19,11748.44 19905.01,11748.44 20110,11953.43 20110,12451.74 20182.12,12523.86 v1(20227,12523.86)
ADC_VOL: IC1.42 R37.2 | length 7186.8
  Top Layer 1 w5: v1(16383.05,10510.94) 16383.05,10508.6 16389.05,10502.6 16389.05,10466.17 IC1.42@16388.94,10466.06
  Unused w5: v1(13850,8526) 13855,10233.53 cw(c13860,10233.52) 13855.79,10236.22 14184.53,10744.28 ccw(c14180.33,10746.99) 14185.2,10745.84 14210,10850 R37.2@14210,11024.25 ; v1(15909.43,8525.57) 16197,8813.15 16197,9279 15929,9547 15929,10189.82 16058.18,10319 16098.02,10319 16289.96,10510.94 v1(16383.05,10510.94)
  Layer 3 w5: v1(13850,8526) v1@15909.43,8526
ADC_VUSB: IC1.27 R11.1 R19.2 | length 6478.2
  Top Layer 1 w5: IC1.27@16212.32,10721.42 16212.35,10721.46 16263.01,10721.46 v1(16263.05,10721.42) ; v1(20247.99,12505.76) 20248.43,12505.32 20282.76,12505.32
  Top Layer 1 w10: 20282.76,12505.32 20644.53,12505.32 20748,12608.79 v2(20769.02,12608.79) ; R11.1@20479.02,12660 20509.02,12660 20526.52,12677.5 v2(20526.52,12710) R19.2@20569.02,12710
  Unused w5: v1(16263.05,10721.42) 16241.3,10743.17 16241.3,11065.98 16276.43,11101.1 16299.88,11101.1 16309.15,11091.83 16439.92,11091.83 16492.37,11144.27 16779.54,11144.27 16795,11128.82 16861.46,11128.82 16978.54,11011.74 17011.09,11011.74 17037,10985.83 17164.29,10985.83 17258,11079.54 17258,11181.12 17672.27,11595.39 18927.28,11595.39 18995.71,11663.82 19450.71,11663.82 19519.96,11733.07 19911.38,11733.07 20125.37,11947.06 20125.37,12445.37 20188.49,12508.49 20239.68,12508.49 20240.35,12507.82 20245.93,12507.82 v1(20247.99,12505.76)
  Bottom 6+gnd w10: v2(20526.52,12710) 20626.52,12610 20767.81,12610 v2(20769.02,12608.79)
AUDIO_BOOT: IC1.3 R106.1 | length 3126.4
  Top Layer 1 w5: R106.1@14895,11393.54 14895,11348.82 v1(14920,11323.82) ; IC1.3@16212.24,11193.94 16282.7,11193.94 16322.82,11153.82 16323.26,11153.82 16328.69,11148.39 16334.55,11148.39 16339.03,11152.87 16355.95,11152.87 16370,11138.82 v1(16374.44,11138.82)
  Unused w5: v1(14920,11323.82) 14920,11208.82 15020.02,11108.8 15020.02,10692.81 14995.19,10667.99 14995.19,10641.31 14959.35,10605.47 14957.33,10605.47 14955.68,10603.82 14955,10603.82 14948.33,10597.15 14948.33,10583.73 14957.33,10574.73 14970.07,10574.73 14994.16,10598.82 16147.06,10598.82 16203.11,10654.87 16203.11,11086.93 16292.88,11176.69 16335.48,11176.69 16335.72,11176.46 16389.1,11176.46 16415,11150.56 16415,11137.82 16405.99,11128.82 16387.35,11128.82 16377.35,11138.82 v1(16374.44,11138.82)
AUDIO_NRST: C8.2 IC2.25 J20.B5 Q2.3 R6.2 | length 6660.8
  Top Layer 1 w5: Q2.3@14640,10629.45 14679.37,10629.45 14699.66,10609.16 14775,10609.16 14781.26,10602.9 14781.26,10580.72 R6.2@14782.35,10579.63 ; C8.2@14771.76,10524.63 14771.76,10569.04 R6.2@14782.35,10579.63 ; IC2.25@14904,10756.68 14858.81,10756.68 14843.39,10741.26 v1(14843.39,10695.26) 14843.39,10620.54 14808.81,10585.96 14788.68,10585.96 R6.2@14782.35,10579.63
  Unused w5: v1(15080,11253.82) 15170,11343.82 16700.17,11343.82 16764.38,11279.61 16764.38,11257.87 16773.38,11248.86 16786.12,11248.86 16793.17,11255.91 16805.23,11255.91 16828.56,11232.58 16876.59,11232.58 16992.97,11116.2 17037.97,11116.2 17075.18,11079 17079.49,11079 17133.47,11132.97 17149.15,11132.97 17171.69,11155.51 17171.69,11294.12 17586.56,11708.99 18478.99,11708.99 18630.37,11860.37 18630.37,12727.65 18763.32,12860.6 18763.32,12923.82 18782.93,12943.43 18829.22,12943.43 18842.4,12930.25 18842.4,12923.69 18851.4,12914.68 18864.14,12914.68 18879.51,12930.05 v1(18897.14,12930.05)
  Layer 3 w5: v1(14843.39,10695.26) 14885,10736.86 14885,11113.82 15026.33,11255.14 15026.33,11261 15034.14,11268.81 15036.02,11268.81 15039.9,11272.68 15061.14,11272.68 v1(15080,11253.82)
  Bottom 6+gnd w5: J20.B5@18896.71,12978.4 18896.71,12930.49 v1(18897.14,12930.05)
AUDIO_RST: IC1.2 R107.1 | length 2792.5
  Top Layer 1 w5: R107.1@14617.36,10768.82 14617.36,10797.95 v1(14617.7,10798.29) ; IC1.2@16212.24,11213.62 16277.16,11213.62 16326.96,11163.82 16380,11163.82 v1(16399.63,11144.19)
  Unused w5: v1(14975,10773.82) 14975,10706.08 14938.33,10669.41 14938.33,10579.59 14953.19,10564.73 14974.21,10564.73 14998.3,10588.82 16167.06,10588.82 16213.11,10634.87 16213.11,11066.93 16301.66,11155.48 16385.43,11155.48 16396.72,11144.19 v1(16399.63,11144.19)
  Bottom 6+gnd w5: v1(14617.7,10798.29) 14814.28,10798.29 14838.75,10773.82 v1(14975,10773.82)
AUDIO_SWD.CLK_1: IC2.109 J15.1 J20.B8 | length 4655.8
  Top Layer 1 w5: IC2.109@15671.25,11307.38 15670.8,11307.83 15670.8,11405.04 15681.81,11416.05 v1(15697.49,11416.05) ; v1@17755,11752.72 J15.1@17755,11778.82
  Unused w5: v1(17755.12,11752.6) 17781.42,11778.9 18463.98,11778.9 18590.37,11905.29 18590.37,12744.22 18689.39,12843.24 18689.39,12948.89 18756.42,13015.92 18756.42,13024.41 v1@18758.62,13026.61
  Bottom 6+gnd w5: v1(15697.49,11416.05) 15697.49,11388.99 15689.65,11381.15 15689.65,11356.99 15692.82,11353.82 16833.76,11353.82 16899.69,11287.89 17029.49,11287.89 17511.4,11769.8 17735.83,11769.8 17753.03,11752.6 v1(17755.12,11752.6) ; J20.B8@18758.91,12978.4 v1@18758.91,13026.32
  other v1: 18758.48,13026.75
AUDIO_SWD.IO_1: IC2.105 J16.1 J20.B7 | length 4729.9
  Top Layer 1 w5: v1(15693.33,11170.26) 15693.43,11170.16 15749.42,11170.16 IC2.105@15749.52,11170.06 ; J16.1@17634.88,11780.04 17634.88,11753.94 v1(17635,11753.82)
  Unused w5: v1(17635,11753.82) 17670.17,11788.98 18459.93,11788.98 18580.37,11909.43 18580.37,12748.36 18679.39,12847.38 18679.39,12953.03 18742.35,13015.99 18742.35,13032.37 18755.04,13045.05 18779.55,13045.05 v1(18797.85,13026.75)
  Bottom 6+gnd w5: v1(15693.33,11170.26) 15693.33,11327.15 15709.63,11343.44 16829.99,11343.44 16895.54,11277.89 17033.63,11277.89 17511.54,11755.81 17633.01,11755.81 v1(17635,11753.82) ; J20.B7@18798.28,12978.4 v1@18798.28,13026.32
AUDIO_SWD.SWO_1: IC2.133 J20.B6 | length 5240.2
  Top Layer 1 w5: IC2.133@15198.81,11307.38 15198.81,11358 v1(15200,11359.19)
  Unused w5: v1(15200,11359.19) 15225.23,11359.19 15230.6,11353.82 16715.47,11353.82 16803.38,11265.91 16809.37,11265.91 16832.7,11242.58 16881.24,11242.58 16995,11128.82 17058.44,11128.82 17100.77,11171.15 17125.39,11171.15 17135.7,11160.83 17139.84,11160.83 17160,11180.99 17160,11188.82 17161.69,11190.51 17161.69,11298.26 17582.42,11718.99 18474.84,11718.99 18620.37,11864.51 18620.37,12731.79 18753.32,12864.75 18753.32,12927.96 18778.78,12953.43 18834.4,12953.43 v1(18857.77,12930.05)
  Bottom 6+gnd w5: v1@18857.34,12930.49 J20.B6@18857.34,12978.4
B_ENC1: IC11_IC101.8 IC15.13 | length 2174.1
  Top Layer 1 w5: IC11_IC101.8@19095.43,11623.82 19167.09,11623.82 19172.09,11618.82 v1(19175,11618.82)
  Top Layer 1 w8: v1(19171.97,11407.3) 19171.97,11324.92 19090.7,11243.65 19090.7,11150.93 19109.3,11132.33 19274.7,10966.93 19300.34,10966.93 19818.64,10966.93 20078.04,11226.33 20440,11226.33 20450,11216.33 IC15.13@20450,11173.82
  Layer 3 w5: v1(19171.97,11407.3) 19171.97,11615.79 v1(19175,11618.82)
B_ENC2: IC11_IC102.8 IC15.4 | length 1056
  Top Layer 1 w8: IC11_IC102.8@20435,11643.82 v1(20510,11643.82) ; IC15.4@20450,10959.25 20450,11002.33 20501.49,11053.82 20611.55,11053.82 20695,11137.27 20695,11250.79 20667.9,11277.89 20575.93,11277.89 20510,11343.82 v1(20510,11423.82)
  Layer 3 w8: v1(20510,11423.82) v1(20510,11643.82)
B_ENC3: IC11_IC103.8 IC16.4 | length 1687.1
  Top Layer 1 w8: IC11_IC103.8@19110.43,10043.82 19150,10043.82 19210,10103.82 19210,10292.1 19433.77,10515.88 20386.65,10515.88 20435.8,10565.02 20441.2,10565.02 20450,10573.82 IC16.4@20450,10591.53
B_ENC4: IC11_IC104.8 IC16.13 | length 1175.7
  Top Layer 1 w8: IC11_IC104.8@20435,10043.82 20503.79,10043.82 20573.79,10113.82 20671.21,10113.82 20740,10182.61 20740,10617.14 20633.32,10723.82 20514.57,10723.82 20450,10788.39 IC16.13@20450,10806.1
B_ENC5: IC11_IC105.8 IC17.13 | length 10098.9
  Top Layer 1 w8: v1(13600.75,9693.82) 13600.75,8605.86 13795.79,8410.82 18862.38,8410.82 19050,8598.43 19050,9195.03 19215.79,9360.82 19823.62,9360.82 20075,9612.2 20075,10235.43 20188.38,10348.82 20430,10348.82 20450,10368.82 IC17.13@20450,10426.1 ; IC11_IC105.8@13622.72,10108.82 v1(13675,10108.82)
  Layer 2 w8: v1(13600.75,9693.82) 13600.75,10034.57 v1(13675,10108.82)
BA0_6: IC1.89 U1.20 U2.20 | length 2533.8
  Top Layer 1 w5: v1(16435.78,10174.13) U1.20@16435.78,10235.97 ; v1@16436.02,10174.38 U1.20@16436.02,10236.22 ; v1@16985.16,10859.29 IC1.89@17057.76,10859.29
  Layer 3 w5: v1(16435.78,9713.5) 16435.78,9805.11 cw(c16440.78,9805.12) 16437.22,9808.63 16450.44,9821.89 ; v1(16435.78,10174.13) ccw(c16440.74,10174.74) 16436.75,10171.73 16450.9,10152.93 ; v1@16435.78,10176.85 16435.78,10175.35 cw(c16440.74,10174.74) 16437.18,10178.25 16450.44,10191.56 ccw(c16446.9,10195.09) 16451.9,10195 ; 16451.9,9825.38 16451.9,10150.02 ; 16451.9,10195.04 v1@16451.9,10316.84 ; 16450.44,9821.89 ccw(c16446.9,9825.42) 16451.9,9825.33 ; 16450.44,9821.89 ccw(c16446.9,9825.42) 16451.9,9825.33 ; 16450.44,9821.89 ccw(c16446.9,9825.42) 16451.9,9825.33 ; 16450.44,9821.89 ccw(c16446.9,9825.42) 16451.9,9825.33 ; 16450.44,9821.89 ccw(c16446.9,9825.42) 16451.9,9825.33 ; 16450.44,9821.89 ccw(c16446.9,9825.42) 16451.9,9825.33 ; 16450.44,9821.89 ccw(c16446.9,9825.42) 16451.9,9825.33 ; 16450.44,9821.89 ccw(c16446.9,9825.42) 16451.9,9825.33 ; 16450.44,9821.89 ccw(c16446.9,9825.42) 16451.9,9825.33 ; 16450.44,9821.89 ccw(c16446.9,9825.42) 16451.9,9825.33 ; 16450.44,9821.89 ccw(c16446.9,9825.42) 16451.9,9825.33 ; 16450.44,9821.89 ccw(c16446.9,9825.42) 16451.9,9825.33 ; 16450.44,9821.89 ccw(c16446.9,9825.42) 16451.9,9825.33 ; 16450.44,9821.89 ccw(c16446.9,9825.42) 16451.9,9825.33 ; 16450.44,9821.89 ccw(c16446.9,9825.42) 16451.9,9825.33 ; 16450.44,9821.89 ccw(c16446.9,9825.42) 16451.9,9825.33 ; 16450.9,10152.94 cw(c16446.9,10149.93) 16451.9,10150.02 ; 16450.9,10152.94 cw(c16446.9,10149.93) 16451.9,10150.02 ; 16450.9,10152.94 cw(c16446.9,10149.93) 16451.9,10150.02 ; 16450.9,10152.94 cw(c16446.9,10149.93) 16451.9,10150.02 ; 16450.9,10152.94 cw(c16446.9,10149.93) 16451.9,10150.02 ; 16450.9,10152.94 cw(c16446.9,10149.93) 16451.9,10150.02 ; 16450.9,10152.94 cw(c16446.9,10149.93) 16451.9,10150.02 ; 16450.9,10152.94 cw(c16446.9,10149.93) 16451.9,10150.02 ; 16450.9,10152.94 cw(c16446.9,10149.93) 16451.9,10150.02 ; 16450.9,10152.94 cw(c16446.9,10149.93) 16451.9,10150.02 ; 16450.9,10152.94 cw(c16446.9,10149.93) 16451.9,10150.02 ; 16450.9,10152.94 cw(c16446.9,10149.93) 16451.9,10150.02 ; 16450.9,10152.94 cw(c16446.9,10149.93) 16451.9,10150.02 ; 16450.9,10152.94 cw(c16446.9,10149.93) 16451.9,10150.02 ; 16450.9,10152.94 cw(c16446.9,10149.93) 16451.9,10150.02 ; 16450.9,10152.94 cw(c16446.9,10149.93) 16451.9,10150.02
  Bottom 6+gnd w5: v1@16436.02,9713.75 U2.20@16436.02,9775.59 ; v1(16451.61,10320.11) 16504.1,10424.96 ; v1(16985.08,10859.21) 17020.46,10815.7 ; 16504.1,10424.96 cw(c16526.79,10413.6) 16523.38,10438.74 ; 16504.1,10424.96 cw(c16526.79,10413.6) 16523.38,10438.74 ; 16504.1,10424.96 cw(c16526.79,10413.6) 16523.38,10438.74 ; 16504.1,10424.96 cw(c16526.79,10413.6) 16523.38,10438.74 ; 16504.1,10424.96 cw(c16526.79,10413.6) 16523.38,10438.74 ; 16504.1,10424.96 cw(c16526.79,10413.6) 16523.38,10438.74 ; 16504.1,10424.96 cw(c16526.79,10413.6) 16523.38,10438.74 ; 16504.1,10424.96 cw(c16526.79,10413.6) 16523.38,10438.74 ; 16504.1,10424.96 cw(c16526.79,10413.6) 16523.38,10438.74 ; 16504.1,10424.96 cw(c16526.79,10413.6) 16523.38,10438.74 ; 16504.1,10424.96 cw(c16526.79,10413.6) 16523.38,10438.74 ; 16504.1,10424.96 cw(c16526.79,10413.6) 16523.38,10438.74 ; 16504.1,10424.96 cw(c16526.79,10413.6) 16523.38,10438.74 ; 16504.1,10424.96 cw(c16526.79,10413.6) 16523.38,10438.74 ; 16504.1,10424.96 cw(c16526.79,10413.6) 16523.38,10438.74 ; 16504.1,10424.96 cw(c16526.79,10413.6) 16523.38,10438.74 ; 16523.38,10438.74 16910.55,10492.07 ccw(c16907.09,10517.2) 16929.64,10505.57 17016.39,10673.8 ; 17016.39,10673.8 ccw(c16993.84,10685.43) 17019.16,10683.89 ; 17016.39,10673.8 ccw(c16993.84,10685.43) 17019.16,10683.89 ; 17016.39,10673.8 ccw(c16993.84,10685.43) 17019.16,10683.89 ; 17016.39,10673.8 ccw(c16993.84,10685.43) 17019.16,10683.89 ; 17016.39,10673.8 ccw(c16993.84,10685.43) 17019.16,10683.89 ; 17016.39,10673.8 ccw(c16993.84,10685.43) 17019.16,10683.89 ; 17016.39,10673.8 ccw(c16993.84,10685.43) 17019.16,10683.89 ; 17016.39,10673.8 ccw(c16993.84,10685.43) 17019.16,10683.89 ; 17016.39,10673.8 ccw(c16993.84,10685.43) 17019.16,10683.89 ; 17016.39,10673.8 ccw(c16993.84,10685.43) 17019.16,10683.89 ; 17016.39,10673.8 ccw(c16993.84,10685.43) 17019.16,10683.89 ; 17016.39,10673.8 ccw(c16993.84,10685.43) 17019.16,10683.89 ; 17016.39,10673.8 ccw(c16993.84,10685.43) 17019.16,10683.89 ; 17016.39,10673.8 ccw(c16993.84,10685.43) 17019.16,10683.89 ; 17016.39,10673.8 ccw(c16993.84,10685.43) 17019.16,10683.89 ; 17016.39,10673.8 ccw(c16993.84,10685.43) 17019.16,10683.89 ; 17019.16,10683.89 17026.1,10798.15 ; 17020.46,10815.7 cw(c17000.78,10799.69) 17026.1,10798.15 ; 17020.46,10815.7 cw(c17000.78,10799.69) 17026.1,10798.16 ; 17020.46,10815.7 cw(c17000.78,10799.69) 17026.1,10798.16 ; 17020.46,10815.7 cw(c17000.78,10799.69) 17026.1,10798.16 ; 17020.46,10815.7 cw(c17000.78,10799.69) 17026.1,10798.16
BA1_6: IC1.90 U1.21 U2.21 | length 2022.6
  Top Layer 1 w5: v1(16404.28,10174.13) U1.21@16404.28,10235.97 ; v1@16404.53,10174.38 U1.21@16404.53,10236.22 ; v1(17005.08,10878.44) 17005.34,10878.71 17057.49,10878.71 IC1.90@17057.6,10878.82
  Layer 3 w5: v1(16404.28,9713.5) 16404.28,9805.11 cw(c16409.28,9805.12) 16405.73,9808.63 16418.95,9821.89 ; v1(16404.28,10174.13) ccw(c16408.44,10176.92) 16404.37,10174.01 16419.48,10152.83 ; v1@16404.28,10179.83 16404.28,10179.7 cw(c16408.44,10176.92) 16404.86,10180.41 16418.95,10194.54 ; 16420.4,9825.38 16420.4,10150.02 ; v1@16420.4,10319.82 16420.4,10198.02 ; 16418.95,9821.89 ccw(c16415.4,9825.42) 16420.4,9825.33 ; 16418.95,9821.89 ccw(c16415.4,9825.42) 16420.4,9825.33 ; 16418.95,9821.89 ccw(c16415.4,9825.42) 16420.4,9825.33 ; 16418.95,9821.89 ccw(c16415.4,9825.42) 16420.4,9825.33 ; 16418.95,9821.89 ccw(c16415.4,9825.42) 16420.4,9825.33 ; 16418.95,9821.89 ccw(c16415.4,9825.42) 16420.4,9825.33 ; 16418.95,9821.89 ccw(c16415.4,9825.42) 16420.4,9825.33 ; 16418.95,9821.89 ccw(c16415.4,9825.42) 16420.4,9825.33 ; 16418.95,9821.89 ccw(c16415.4,9825.42) 16420.4,9825.33 ; 16418.95,9821.89 ccw(c16415.4,9825.42) 16420.4,9825.33 ; 16418.95,9821.89 ccw(c16415.4,9825.42) 16420.4,9825.33 ; 16418.95,9821.89 ccw(c16415.4,9825.42) 16420.4,9825.33 ; 16418.95,9821.89 ccw(c16415.4,9825.42) 16420.4,9825.33 ; 16418.95,9821.89 ccw(c16415.4,9825.42) 16420.4,9825.33 ; 16418.95,9821.89 ccw(c16415.4,9825.42) 16420.4,9825.33 ; 16418.95,9821.89 ccw(c16415.4,9825.42) 16420.4,9825.33 ; 16418.95,10194.54 ccw(c16415.4,10198.07) 16420.4,10197.98 ; 16418.95,10194.54 ccw(c16415.4,10198.07) 16420.4,10197.98 ; 16418.95,10194.54 ccw(c16415.4,10198.07) 16420.4,10197.98 ; 16418.95,10194.54 ccw(c16415.4,10198.07) 16420.4,10197.98 ; 16418.95,10194.54 ccw(c16415.4,10198.07) 16420.4,10197.98 ; 16418.95,10194.54 ccw(c16415.4,10198.07) 16420.4,10197.98 ; 16418.95,10194.54 ccw(c16415.4,10198.07) 16420.4,10197.98 ; 16418.95,10194.54 ccw(c16415.4,10198.07) 16420.4,10197.98 ; 16418.95,10194.54 ccw(c16415.4,10198.07) 16420.4,10197.98 ; 16418.95,10194.54 ccw(c16415.4,10198.07) 16420.4,10197.98 ; 16418.95,10194.54 ccw(c16415.4,10198.07) 16420.4,10197.98 ; 16418.95,10194.54 ccw(c16415.4,10198.07) 16420.4,10197.98 ; 16418.95,10194.54 ccw(c16415.4,10198.07) 16420.4,10197.98 ; 16418.95,10194.54 ccw(c16415.4,10198.07) 16420.4,10197.98 ; 16418.95,10194.54 ccw(c16415.4,10198.07) 16420.4,10197.98 ; 16418.95,10194.54 ccw(c16415.4,10198.07) 16420.4,10197.98 ; 16419.48,10152.83 cw(c16415.4,10149.93) 16420.4,10150.02 ; 16419.48,10152.83 cw(c16415.4,10149.93) 16420.4,10150.02 ; 16419.48,10152.83 cw(c16415.4,10149.93) 16420.4,10150.02 ; 16419.48,10152.83 cw(c16415.4,10149.93) 16420.4,10150.02 ; 16419.48,10152.83 cw(c16415.4,10149.93) 16420.4,10150.02 ; 16419.48,10152.83 cw(c16415.4,10149.93) 16420.4,10150.02 ; 16419.48,10152.83 cw(c16415.4,10149.93) 16420.4,10150.02 ; 16419.48,10152.83 cw(c16415.4,10149.93) 16420.4,10150.02 ; 16419.48,10152.83 cw(c16415.4,10149.93) 16420.4,10150.02 ; 16419.48,10152.83 cw(c16415.4,10149.93) 16420.4,10150.02 ; 16419.48,10152.83 cw(c16415.4,10149.93) 16420.4,10150.02 ; 16419.48,10152.83 cw(c16415.4,10149.93) 16420.4,10150.02 ; 16419.48,10152.83 cw(c16415.4,10149.93) 16420.4,10150.02 ; 16419.48,10152.83 cw(c16415.4,10149.93) 16420.4,10150.02 ; 16419.48,10152.83 cw(c16415.4,10149.93) 16420.4,10150.02 ; 16419.48,10152.83 cw(c16415.4,10149.93) 16420.4,10150.02
  Bottom 6+gnd w5: v1@16404.53,9713.75 U2.21@16404.53,9775.59 ; v1(16420.12,10320.11) 16497.57,10433.55 cw(c16526.79,10413.6) 16521.96,10448.64 16909.18,10501.97 ccw(c16907.09,10517.2) 16920.75,10510.16 17007.5,10678.38 ccw(c16993.84,10685.43) 17009.18,10684.49 17016.12,10798.76 ccw(c17000.78,10799.69) 17011.7,10810.51 16989.37,10832.83 16989.37,10833.37 16980.31,10842.43 16980.12,10842.43 16974.16,10848.39 cw(c16985.08,10859.21) 16982.26,10874.33 ; 16982.26,10874.32 v1@17005.05,10878.58 ; v1(17005.08,10878.44) v1@17005.08,10878.55
BA01_7: IC2.89 U3.20 U4.20 | length 2319.1
  Top Layer 1 w5: v1@15127.72,10170.19 U3.20@15127.72,10232.03 ; v1@15676.86,10855.1 IC2.89@15749.52,10855.1
  Layer 3 w5: v1(15127.48,9709.47) 15127.48,9803 15143.6,9819.12 15143.6,10147.74 15142.38,10149.03 15128.45,10167.54 cw(c15132.44,10170.55) v1(15127.48,10169.94) ; v1@15127.48,10171.16 cw(c15132.44,10170.55) 15128.88,10174.06 15142.14,10187.37 ccw(c15138.6,10190.9) 15143.6,10190.81 ; 15143.6,10190.85 v1@15143.6,10312.65
  Bottom 6+gnd w5: v1(15127.48,9709.47) 15127.48,9771.15 U4.20@15127.72,9771.4 ; v1@15143.07,10316.17 v1(15143.31,10315.92) 15195.8,10420.77 cw(c15218.49,10409.41) 15214.27,10434.43 15537.41,10489.38 ; v1@15676.53,10855.27 v1(15676.78,10855.02) 15715.48,10812.8 ; 15537.41,10489.38 ccw(c15533.16,10514.39) 15548.47,10494.16 ; 15537.41,10489.38 ccw(c15533.16,10514.39) 15548.47,10494.16 ; 15537.41,10489.38 ccw(c15533.16,10514.39) 15548.47,10494.16 ; 15537.41,10489.38 ccw(c15533.16,10514.39) 15548.47,10494.16 ; 15537.41,10489.38 ccw(c15533.16,10514.39) 15548.47,10494.16 ; 15537.41,10489.38 ccw(c15533.16,10514.39) 15548.47,10494.16 ; 15537.41,10489.38 ccw(c15533.16,10514.39) 15548.47,10494.16 ; 15537.41,10489.38 ccw(c15533.16,10514.39) 15548.47,10494.16 ; 15537.41,10489.38 ccw(c15533.16,10514.39) 15548.47,10494.16 ; 15537.41,10489.38 ccw(c15533.16,10514.39) 15548.47,10494.16 ; 15537.41,10489.38 ccw(c15533.16,10514.39) 15548.47,10494.16 ; 15537.41,10489.38 ccw(c15533.16,10514.39) 15548.47,10494.16 ; 15537.41,10489.38 ccw(c15533.16,10514.39) 15548.47,10494.16 ; 15537.41,10489.38 ccw(c15533.16,10514.39) 15548.47,10494.16 ; 15537.41,10489.38 ccw(c15533.16,10514.39) 15548.47,10494.16 ; 15537.41,10489.38 ccw(c15533.16,10514.39) 15548.47,10494.16 ; 15548.47,10494.16 15712.09,10617.94 ; 15712.09,10617.94 ccw(c15696.78,10638.17) 15722.15,10638.17 ; 15712.09,10617.94 ccw(c15696.78,10638.17) 15722.15,10638.17 ; 15712.09,10617.94 ccw(c15696.78,10638.17) 15722.15,10638.17 ; 15712.09,10617.94 ccw(c15696.78,10638.17) 15722.15,10638.17 ; 15712.09,10617.94 ccw(c15696.78,10638.17) 15722.15,10638.17 ; 15715.48,10812.8 cw(c15696.78,10795.65) 15722.15,10795.65 ; 15715.48,10812.8 cw(c15696.78,10795.65) 15722.15,10795.65 ; 15715.48,10812.8 cw(c15696.78,10795.65) 15722.15,10795.65 ; 15715.48,10812.8 cw(c15696.78,10795.65) 15722.15,10795.65 ; 15715.48,10812.8 cw(c15696.78,10795.65) 15722.15,10795.65 ; 15715.48,10812.8 cw(c15696.78,10795.65) 15722.15,10795.65 ; 15715.48,10812.8 cw(c15696.78,10795.65) 15722.15,10795.65 ; 15715.48,10812.8 cw(c15696.78,10795.65) 15722.15,10795.65 ; 15715.48,10812.8 cw(c15696.78,10795.65) 15722.15,10795.65 ; 15715.48,10812.8 cw(c15696.78,10795.65) 15722.15,10795.65 ; 15715.48,10812.8 cw(c15696.78,10795.65) 15722.15,10795.65 ; 15715.48,10812.8 cw(c15696.78,10795.65) 15722.15,10795.65 ; 15715.48,10812.8 cw(c15696.78,10795.65) 15722.15,10795.65 ; 15715.48,10812.8 cw(c15696.78,10795.65) 15722.15,10795.65 ; 15715.48,10812.8 cw(c15696.78,10795.65) 15722.15,10795.65 ; 15715.48,10812.8 cw(c15696.78,10795.65) 15722.15,10795.65 ; 15722.15,10638.17 15722.15,10795.65
BA11_7: IC2.90 U3.21 U4.21 | length 2339
  Top Layer 1 w5: v1@15096.23,10170.19 U3.21@15096.23,10232.03 ; v1@15697.01,10874.63 IC2.90@15749.3,10874.63
  Layer 3 w5: v1(15095.98,9709.47) 15095.98,9803 15112.1,9819.12 15112.1,10147.71 15110.93,10148.98 15096.07,10169.82 cw(c15100.14,10172.73) v1(15095.98,10169.94) ; v1@15095.98,10175.64 15095.98,10175.51 cw(c15100.14,10172.73) 15096.56,10176.22 15110.65,10190.35 ; 15112.1,10193.83 v1@15112.1,10315.63 ; 15110.65,10190.35 ccw(c15107.1,10193.88) 15112.1,10193.79 ; 15110.65,10190.35 ccw(c15107.1,10193.88) 15112.1,10193.79 ; 15110.65,10190.35 ccw(c15107.1,10193.88) 15112.1,10193.79 ; 15110.65,10190.35 ccw(c15107.1,10193.88) 15112.1,10193.79 ; 15110.65,10190.35 ccw(c15107.1,10193.88) 15112.1,10193.79 ; 15110.65,10190.35 ccw(c15107.1,10193.88) 15112.1,10193.79 ; 15110.65,10190.35 ccw(c15107.1,10193.88) 15112.1,10193.79 ; 15110.65,10190.35 ccw(c15107.1,10193.88) 15112.1,10193.79 ; 15110.65,10190.35 ccw(c15107.1,10193.88) 15112.1,10193.79 ; 15110.65,10190.35 ccw(c15107.1,10193.88) 15112.1,10193.79 ; 15110.65,10190.35 ccw(c15107.1,10193.88) 15112.1,10193.79 ; 15110.65,10190.35 ccw(c15107.1,10193.88) 15112.1,10193.79 ; 15110.65,10190.35 ccw(c15107.1,10193.88) 15112.1,10193.79 ; 15110.65,10190.35 ccw(c15107.1,10193.88) 15112.1,10193.79 ; 15110.65,10190.35 ccw(c15107.1,10193.88) 15112.1,10193.79 ; 15110.65,10190.35 ccw(c15107.1,10193.88) 15112.1,10193.79
  Bottom 6+gnd w5: v1(15095.98,9709.47) 15095.98,9771.15 U4.21@15096.23,9771.4 ; v1@15111.57,10316.17 v1(15111.82,10315.92) 15189.27,10429.36 ; v1@15696.53,10874.64 v1(15696.78,10874.39) 15673.96,10870.13 ccw(c15676.78,10855.02) 15666.49,10843.6 15707.06,10807.08 cw(c15696.78,10795.65) 15712.15,10795.65 15712.15,10638.17 ; 15189.27,10429.36 cw(c15218.49,10409.41) 15212.56,10444.28 ; 15189.27,10429.36 cw(c15218.49,10409.41) 15212.56,10444.28 ; 15189.27,10429.36 cw(c15218.49,10409.41) 15212.56,10444.28 ; 15189.27,10429.36 cw(c15218.49,10409.41) 15212.56,10444.28 ; 15189.27,10429.36 cw(c15218.49,10409.41) 15212.56,10444.28 ; 15189.27,10429.36 cw(c15218.49,10409.41) 15212.56,10444.28 ; 15189.27,10429.36 cw(c15218.49,10409.41) 15212.56,10444.28 ; 15189.27,10429.36 cw(c15218.49,10409.41) 15212.56,10444.28 ; 15189.27,10429.36 cw(c15218.49,10409.41) 15212.56,10444.28 ; 15189.27,10429.36 cw(c15218.49,10409.41) 15212.56,10444.28 ; 15189.27,10429.36 cw(c15218.49,10409.41) 15212.56,10444.28 ; 15189.27,10429.36 cw(c15218.49,10409.41) 15212.56,10444.28 ; 15189.27,10429.36 cw(c15218.49,10409.41) 15212.56,10444.28 ; 15189.27,10429.36 cw(c15218.49,10409.41) 15212.56,10444.28 ; 15189.27,10429.36 cw(c15218.49,10409.41) 15212.56,10444.28 ; 15189.27,10429.36 cw(c15218.49,10409.41) 15212.56,10444.28 ; 15212.56,10444.28 15535.73,10499.24 ccw(c15533.16,10514.39) 15542.43,10502.13 15706.05,10625.91 ; 15706.05,10625.91 ccw(c15696.78,10638.17) 15712.15,10638.17 ; 15706.06,10625.92 ccw(c15696.78,10638.17) 15712.15,10638.17 ; 15706.06,10625.92 ccw(c15696.78,10638.17) 15712.15,10638.17 ; 15706.06,10625.92 ccw(c15696.78,10638.17) 15712.15,10638.17 ; 15706.06,10625.92 ccw(c15696.78,10638.17) 15712.15,10638.17
BTN_1: IC11_IC101.12 IC15.14 | length 1885.5
  Top Layer 1 w8: IC11_IC101.12@19095.85,11424.24 19137.94,11424.24 19142.63,11419.55 19142.63,11314.98 19077.7,11250.05 19077.7,11145.55 19096.3,11126.95 19269.32,10953.93 19294.96,10953.93 19824.02,10953.93 20083.43,11213.33 20378.2,11213.33 20400,11191.54 IC15.14@20400,11173.82
BTN_2: IC11_IC102.12 IC15.3 | length 849.2
  Top Layer 1 w8: IC15.3@20400,10959.25 20400,10976.97 20496.85,11073.82 20613.17,11073.82 20680,11140.65 20680,11238.82 20660,11258.82 20565,11258.82 20490,11333.82 20490,11428.82 20475,11443.82 IC11_IC102.12@20435,11443.82
BTN_3: IC11_IC103.12 IC16.3 | length 1872.2
  Top Layer 1 w8: IC11_IC103.12@19110.43,9843.82 v1(19170,9843.82) ; v1(19170,10108.82) 19195,10133.82 19195,10298.32 19425.56,10528.88 20373.78,10528.88 20398.61,10553.71 20398.61,10590.15 IC16.3@20400,10591.53
  Layer 3 w8: v1(19170,9843.82) v1(19170,10108.82)
BTN_4: IC11_IC104.12 IC16.14 | length 1398
  Top Layer 1 w8: IC16.14@20400,10806.1 20400,10788.39 20479.57,10708.82 20623.54,10708.82 20725,10607.36 20725,10188.82 20665,10128.82 20567.57,10128.82 20543.79,10105.03 20526.21,10105.03 v1(20490,10068.82) ; IC11_IC104.12@20435,9843.82 v1(20485,9843.82)
  Layer 3 w8: v1(20485,9843.82) 20485,10061.72 20490,10066.72 v1(20490,10068.82)
BTN_5: IC11_IC105.12 IC17.14 | length 9803.1
  Top Layer 1 w8: IC11_IC105.12@13622.72,9908.82 v1(13675,9908.82) ; v1(13626.5,9693.82) 13626.5,8598.49 13801.17,8423.82 18857,8423.82 19037,8603.82 19037,9200.42 19210.4,9373.82 19818.23,9373.82 20062,9617.59 20062,10240.82 20183,10361.82 20388,10361.82 20400,10373.82 IC17.14@20400,10426.1
  Layer 2 w8: v1(13626.5,9693.82) 13626.5,9695.31 13675,9743.82 v1(13675,9908.82)
BTN_DN: IC16.6 R80.1 SW7.S1 | length 3013.2
  Top Layer 1 w8: v1(18977.44,10120.5) 19425.76,10568.82 20145,10568.82 20240,10663.82 20320,10663.82 20320.84,10662.98 20515.84,10662.98 20549.46,10629.36 20549.46,10592.08 IC16.6@20550,10591.53 v1(20550,10528.82) ; v1(20785,10578.82) R80.1@20835,10578.82
  Unused w8: SW7.S1@18641.34,10328.22 18641.34,10030.98 SW7.S1@18690.94,9981.37 SW7.S1@18773.62,9981.37
  Layer 3 w8: SW7.S1@18773.62,9981.37 18838.31,9981.37 v1(18977.44,10120.5) ; v1(20550,10528.82) 20630,10448.82 20685,10448.82 20785,10548.82 v1(20785,10578.82)
BTN_FUNC: IC17.6 R82.1 SW8.S1 | length 8525.8
  Top Layer 1 w8: SW8.S1@14360.63,8815 14360.63,8490 ; R82.1@14435,8490 14360.63,8490 ; v1(19990,9595) 19990,9565 19815,9390 19205,9390 19024,9209 19024,8614 18846.82,8436.82 14403.18,8436.82 14360.63,8479.37 14360.63,8490 ; v1@20219.41,9594.41 20194.19,9619.63 20194.19,10104.63 20223.38,10133.82 20510,10133.82 20541.2,10165.02 20541.2,10202.74 IC17.6@20550,10211.53
  Unused w8: SW8.S1@14013.78,8682.72 SW8.S1@14013.78,8765.39 14063.38,8815 SW8.S1@14360.63,8815
  Layer 3 w8: v1(19990,9595) v1(20220,9595)